# Altium PCB SD171-5.0PCB3.PcbDoc (part 4 of 5)
Units mm, origin at the board's own origin, x right, y up, seen from the top; angles counter-clockwise.
Board outline 152.27 x 99.6 mm, 6 copper layers (Top Layer, InternalPlane1, Mid-Layer 1, Mid-Layer 2, InternalPlane2, Bottom Layer); 397 components, 337 nets, 1868 pads, 651 vias.
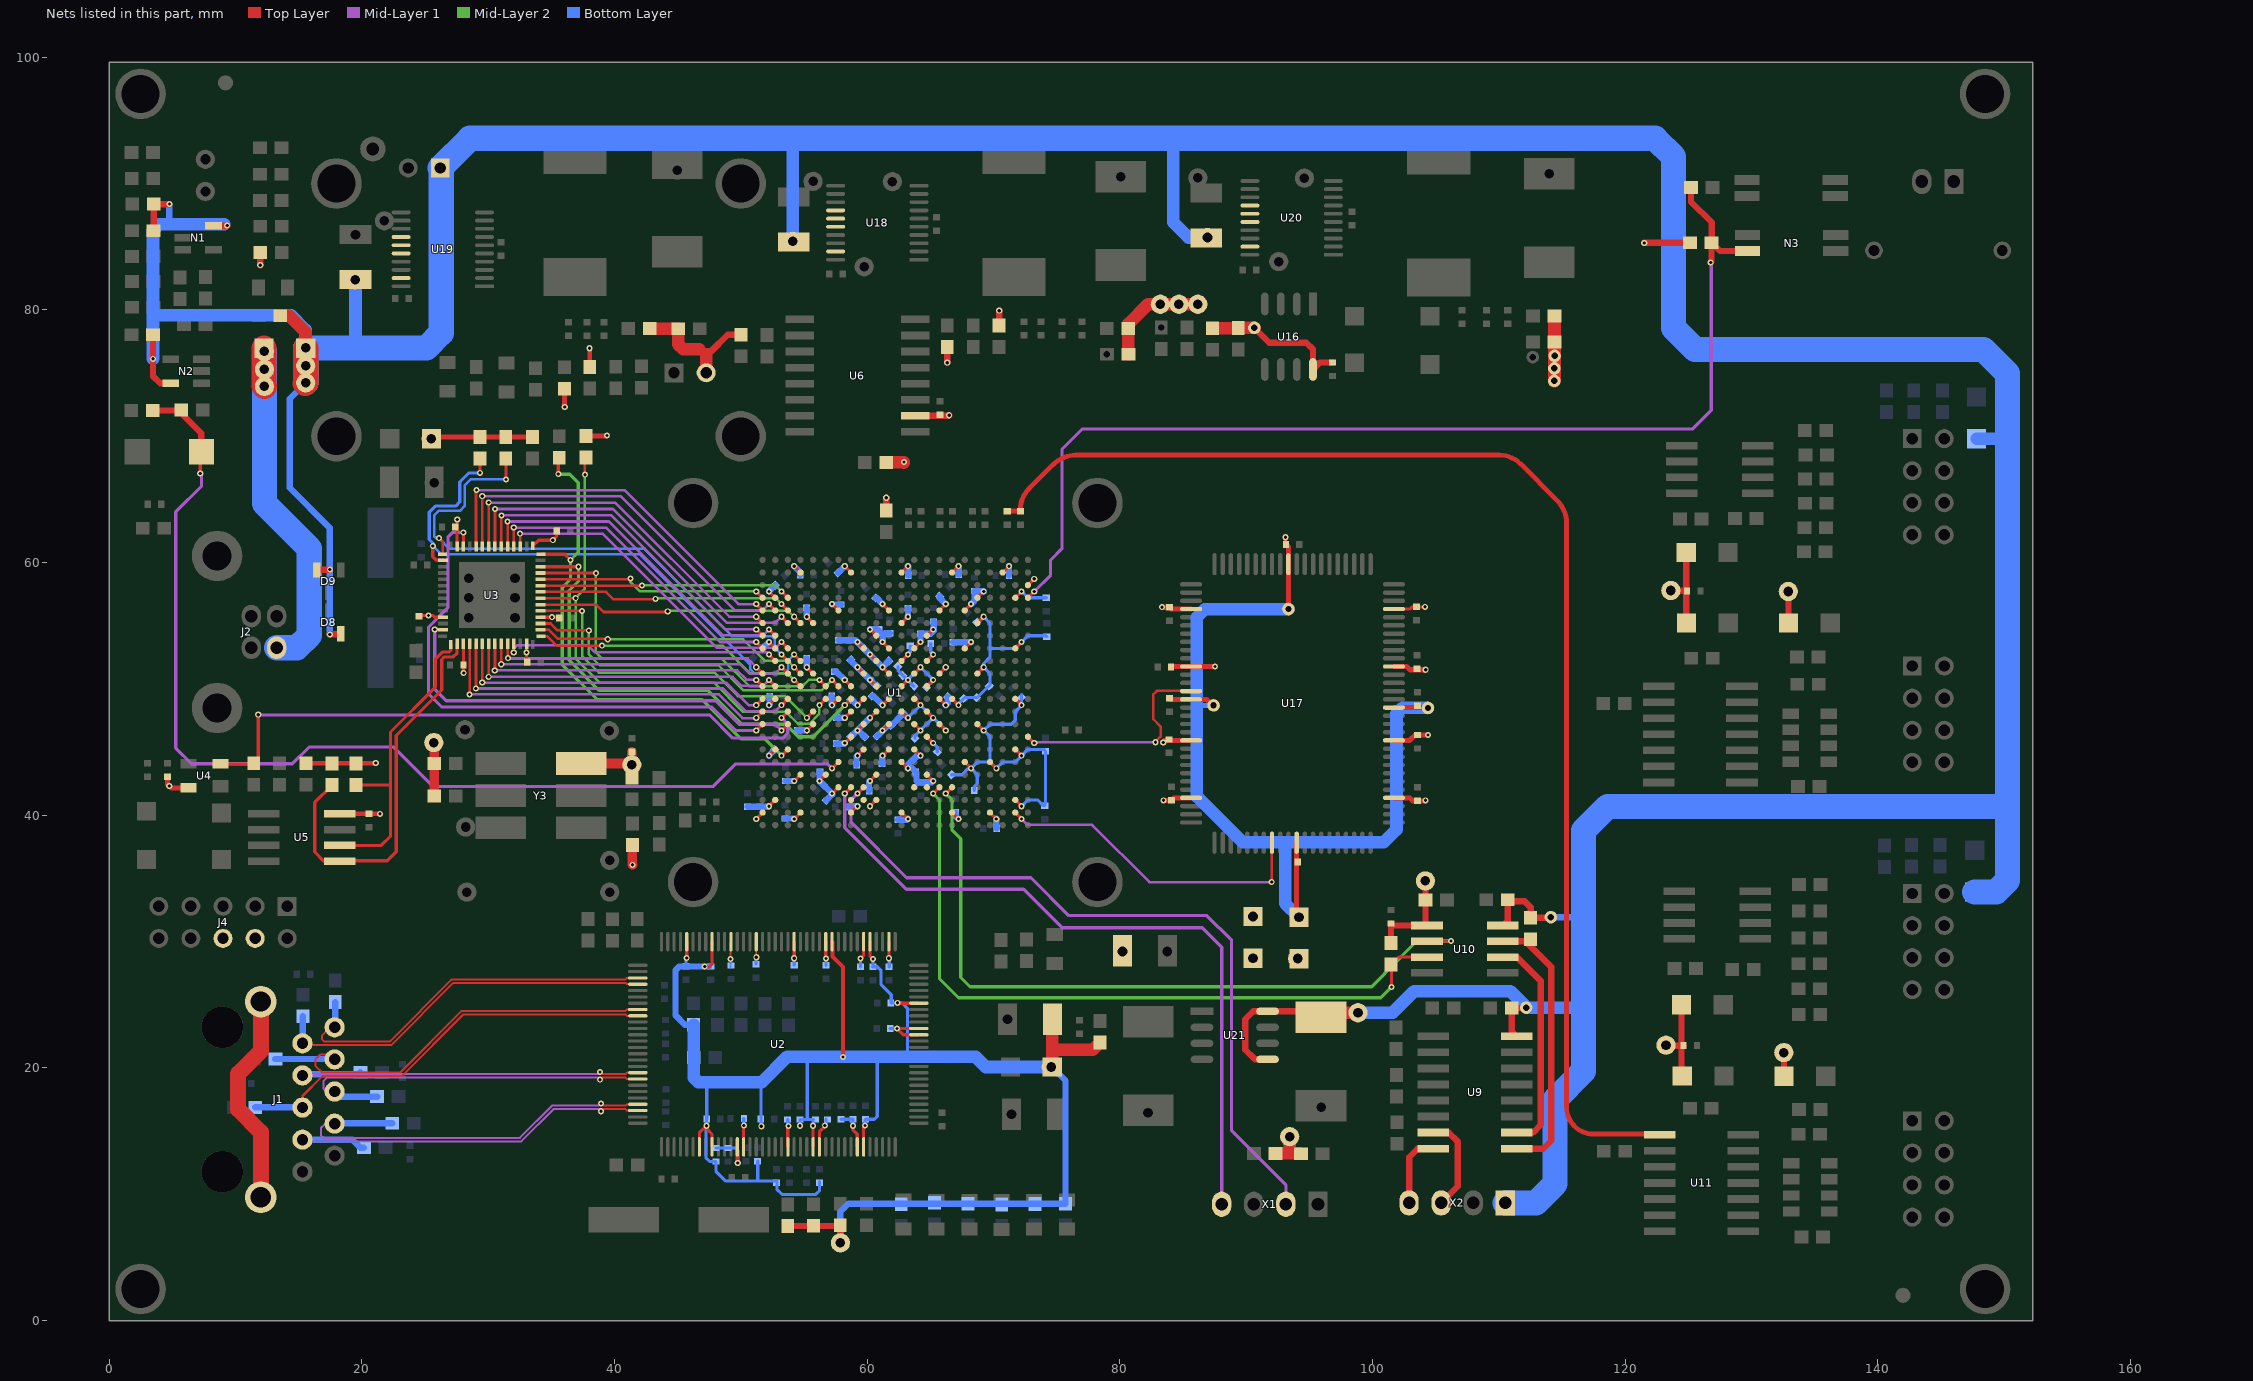
[diagram p8: the nets of this part, all layers, seen from the top]

## Via types
v1: diameter 0.483, hole 0.254, Top Layer to Bottom Layer, 651 vias

## Nets (pads, with @x,y where several pads share a name; then routed paths per layer and width w, separated by ;. In a path a pad name is that pad's centre, name@x,y a point inside that pad or via, vN(x,y) a via of type N, cw(c..) or ccw(c..) an arc to the next point about the centre after c; other vN are vias at no path point) (continued)
OPTX2: R81.1 R83.1 U11.1 | length 104.4
  Top Layer w0.203: R81.1@72.131,64.182 R81.1@72.131,64.071 ccw(c72.131,64.104) R81.1@72.164,64.104 ; 120.323,14.762 120.653,14.762 ; U11.1@122.696,14.762 cw(c122.696,14.702) U11.1@122.755,14.702
  Top Layer w0.381: R83.1@71.097,64.071 R81.1@72.131,64.071 ; R81.1@72.131,64.182 cw(c74.461,64.182) 72.814,65.83 74.748,67.764 cw(c76.544,65.968) 76.544,68.508 110.036,68.508 cw(c110.036,66.117) 111.727,67.808 114.626,64.909 cw(c112.83,63.113) 115.37,63.113 115.37,16.895 ccw(c117.503,16.895) 117.503,14.762 120.653,14.762 U11.1@122.696,14.762
R0: U9.8 X2.4 | length 5.8
  Top Layer w0.5: X2.4@102.905,9.313 102.905,12.939 103.575,13.61 U9.8@104.823,13.61
RXD: R65.1 U9.9 U10.7 | length 21.4
  Top Layer w0.508: U10.7@110.324,30.023 112.12,30.023 113.002,29.142 114.151,27.993 114.151,14.228 113.532,13.61 U9.9@111.427,13.61
RXD0: U1.D7 U10.2 | length 58.3
  Top Layer w0.254: v1(66.233,41.712) U1.D7@66.733,42.212 ; U10.2@104.324,30.023 104.353,30.053 v1(106.226,30.053)
  Mid-Layer 2 w0.254: v1(66.233,41.712) 66.729,41.216 66.729,38.816 67.415,38.13 67.415,27.157 68.151,26.42 99.952,26.42 100.968,27.436 100.968,27.487 103.533,30.053 v1(106.226,30.053)
SCL: R48.2 U3.15 U5.6 | length 24.5
  Top Layer w0.254: U5.6@18.249,37.613 21.558,37.613 22.279,38.333 22.279,42.397 ; R48.2@19.561,42.384 22.266,42.384 22.279,42.397 ; U3.15@27.049,53.525 27.049,53.06 26.902,52.913 26.388,52.913 25.835,52.359 25.835,50.144 22.279,46.588 22.279,42.397
SDA: R49.2 U3.16 U5.5 | length 31.8
  Top Layer w0.254: R49.2@17.656,42.384 16.284,41.013 16.284,37.088 17.01,36.363 U5.5@18.249,36.363 18.289,36.403 22.025,36.403 22.736,37.114 22.736,46.309 26.343,49.915 26.343,52.328 26.546,52.532 27.257,52.532 27.549,52.824 U3.16@27.549,53.575
SEL_FREQ: R111.2 R112.2 U2.77 | length 4.1
  Top Layer w0.254: U2.77@49.73,13.747 49.73,12.507 v1(49.762,12.476)
  Bottom Layer w0.254: R111.2@48.04,13.661 49.593,13.661 49.787,13.466 49.787,12.501 v1(49.762,12.476)
SHIELD: J1.M1 J1.M2 | length 17
  Top Layer w1.27: J1.M2@12.012,9.759 12.012,14.92 10.214,16.718 10.214,19.537 12.012,21.335 J1.M1@12.012,25.249
SYS_RST#: R50.2 U1.K20 U4.2 | length 51.6
  Top Layer w0.254: U4.2@8.818,44.066 11.407,44.066 R50.2@11.452,44.112 11.814,44.473 v1(11.814,47.96) ; v1(53.233,47.712) U1.K20@53.733,48.212
  Mid-Layer 1 w0.254: v1(11.814,47.96) 11.839,47.934 47.552,47.934 49.381,46.105 53.327,46.105 53.728,46.507 53.728,47.217 v1(53.233,47.712)
T0: U9.7 X2.3 | length 7.6
  Top Layer w0.5: U9.7@104.823,14.88 106.057,14.88 106.759,14.178 106.759,10.627 X2.3@105.445,9.313
TD0_N: J1.2 R6.2 U2.42 | length 30.9
  Top Layer w0.159: J1.2@15.312,21.944 15.458,21.798 22.325,21.798 27.257,26.73 40.885,26.73 40.993,26.622 U2.42@41.855,26.622
  Bottom Layer w0.508: J1.2@15.312,21.944 15.346,21.978 R6.2@15.346,24.089
TD0_P: J1.1 R5.2 U2.41 | length 30.8
  Top Layer w0.159: J1.1@17.852,23.214 17.497,23.214 16.843,22.56 16.843,22.28 17.04,22.083 22.207,22.083 27.139,27.015 40.885,27.015 40.993,27.122 U2.41@41.855,27.122
  Bottom Layer w0.508: J1.1@17.852,23.214 17.911,23.273 R5.2@17.911,25.207
TD1_N: J1.6 R8.2 U2.47 | length 33.9
  Top Layer w0.159: J1.6@15.312,16.864 15.312,17.777 16.888,19.353 23.161,19.353 28.038,24.23 40.885,24.23 40.993,24.122 U2.47@41.855,24.122
  Bottom Layer w0.508: R8.2@11.573,16.87 15.305,16.87 J1.6@15.312,16.864
TD1_P: J1.3 R7.2 U2.46 | length 34.8
  Top Layer w0.159: J1.3@17.852,20.674 17.464,21.061 16.716,21.061 16.361,20.705 16.361,20.147 16.869,19.639 23.043,19.639 27.92,24.515 40.885,24.515 40.993,24.622 U2.46@41.855,24.622
  Bottom Layer w0.508: R7.2@13.173,20.705 17.82,20.705 J1.3@17.852,20.674
TD2_N: J1.5 R10.2 U2.57 | length 30.3
  Top Layer w0.159: v1(38.865,19.068) 39.027,19.23 40.885,19.23 40.993,19.122 U2.57@41.855,19.122
  Mid-Layer 1 w0.159: J1.5@17.852,18.134 17.205,18.134 16.97,18.369 16.97,18.953 17.247,19.23 38.703,19.23 v1(38.865,19.068)
  Bottom Layer w0.508: J1.5@17.852,18.134 18.253,17.732 R10.2@21.217,17.732
TD2_P: J1.4 R9.2 U2.56 | length 31.5
  Top Layer w0.159: v1(38.865,19.677) 39.027,19.515 40.885,19.515 40.993,19.622 U2.56@41.855,19.622
  Mid-Layer 1 w0.159: J1.4@15.312,19.404 15.423,19.515 38.703,19.515 v1(38.865,19.677)
  Bottom Layer w0.508: J1.4@15.312,19.404 15.401,19.493 19.735,19.493 R9.2@19.898,19.655
TD3_N: J1.8 R12.2 U2.62 | length 33.3
  Top Layer w0.159: v1(38.941,16.568) 39.103,16.73 40.885,16.73 40.993,16.622 U2.62@41.855,16.622
  Mid-Layer 1 w0.159: J1.8@15.555,14.567 J1.8@15.312,14.324 15.458,14.178 32.63,14.178 35.182,16.73 38.779,16.73 v1(38.941,16.568)
  Bottom Layer w0.508: J1.8@15.312,14.324 19.263,14.324 19.893,13.694 R12.2@20.176,13.694
TD3_P: J1.7 R11.2 U2.61 | length 32.8
  Top Layer w0.159: v1(38.941,17.177) 39.103,17.015 40.885,17.015 40.993,17.122 U2.61@41.855,17.122
  Mid-Layer 1 w0.159: J1.7@17.852,15.594 17.116,15.594 16.767,15.244 16.767,14.686 16.989,14.463 32.512,14.463 35.064,17.015 38.779,17.015 v1(38.941,17.177)
  Bottom Layer w0.508: J1.7@17.852,15.594 17.875,15.617 R11.2@22.413,15.617
TEST1: U1.D9
TEST2: U1.D10
TEST3: U1.C13 | length 0.7
  Top Layer w0.254: v1(60.233,40.712) U1.C13@60.733,41.212
TEST4: U1.C14
TEST5: U1.D14 X1.2 | length 59.8
  Top Layer w0.254: v1(59.233,41.712) U1.D14@59.733,42.212
  Mid-Layer 1 w0.254: v1(59.233,41.712) 58.738,41.217 58.738,39.441 63.122,35.056 72.977,35.056 75.974,32.059 86.896,32.059 88.852,30.103 88.852,15.041 93.151,10.742 X1.2@93.151,9.211
TEST6: U1.C15
TEST7: U1.D15 X1.4 | length 57.5
  Top Layer w0.254: v1(58.233,41.712) U1.D15@58.733,42.212
  Mid-Layer 1 w0.254: v1(58.233,41.712) 58.233,39.654 58.233,39.026 63.117,34.142 72.393,34.142 75.441,31.094 86.541,31.094 88.071,29.564 X1.4@88.071,9.211
TONGBU_E: N3.4 R107.1 R109.2 U1.W1 | length 87
  Top Layer w0.254: U1.W1@72.733,57.212 v1(73.233,57.712)
  Top Layer w0.5: R109.2@125.214,89.684 125.214,88.56 126.851,86.923 126.851,85.327 R107.1@126.839,85.316 ; v1(126.774,83.748) 126.839,83.813 R107.1@126.839,85.316 ; N3.4@129.697,84.655 127.544,84.655 126.883,85.316 R107.1@126.839,85.316
  Mid-Layer 1 w0.254: v1(73.233,57.712) 74.527,59.006 74.527,60.202 75.441,61.117 75.441,68.991 77.016,70.566 125.327,70.566 126.825,72.064 126.825,83.697 v1(126.774,83.748)
TONGBU_L: D13.2 R103.1 R105.2 U1.F16 | length 86.5
  Top Layer w0.254: v1(7.217,67.06) 7.217,68.667 D13.2@7.311,68.761 ; v1(57.233,43.712) U1.F16@57.733,44.212
  Top Layer w0.508: R105.2@3.463,72.037 5.698,72.037 R103.1@5.723,72.063 5.723,71.83 7.311,70.243 D13.2@7.311,68.761
  Mid-Layer 1 w0.254: v1(7.217,67.06) 7.293,67.06 7.318,67.035 7.318,66.044 5.286,64.012 5.286,45.318 6.531,44.073 14.506,44.073 15.827,45.394 22.533,45.394 25.657,42.27 47.78,42.27 49.558,44.048 56.897,44.048 v1(57.233,43.712)
TXD: U9.10 U10.6 | length 17.3
  Top Layer w0.5: U10.6@110.324,28.773 111.442,28.773 113.338,26.878 113.338,15.498 112.719,14.88 U9.10@111.427,14.88
TXD0: R64.1 U1.D8 U10.3 | length 57.2
  Top Layer w0.254: v1(65.233,41.712) U1.D8@65.733,42.212 ; v1(101.501,26.395) 101.501,28.145 R64.1@101.47,28.177 102.067,28.773 U10.3@104.324,28.773
  Mid-Layer 2 w0.254: v1(65.233,41.712) 65.738,41.207 65.738,27.056 67.237,25.557 100.663,25.557 v1(101.501,26.395)
UD0: U1.K22 U3.18 | length 28.2
  Top Layer w0.203: v1(28.527,49.56) 28.549,49.582 U3.18@28.549,53.575
  Top Layer w0.254: v1(51.233,47.712) U1.K22@51.733,48.212
  Mid-Layer 1 w0.203: v1(28.527,49.56) 48.263,49.56 50.143,47.68 51.201,47.68 v1(51.233,47.712)
UD1: U1.L20 U3.19 | length 29.4
  Top Layer w0.203: v1(29.035,50.042) 29.049,50.056 U3.19@29.049,53.575
  Top Layer w0.254: v1(53.233,48.712) U1.L20@53.733,49.212
  Mid-Layer 1 w0.203: v1(29.035,50.042) 29.048,50.03 48.584,50.03 50.371,48.242 52.763,48.242 v1(53.233,48.712)
UD2: U1.L22 U3.20 | length 26.2
  Top Layer w0.203: v1(29.543,50.5) 29.549,50.506 U3.20@29.549,53.575
  Top Layer w0.254: v1(51.233,48.712) U1.L22@51.733,49.212
  Mid-Layer 1 w0.203: v1(29.543,50.5) 29.569,50.474 48.863,50.474 50.625,48.712 v1(51.233,48.712)
UD3: U1.M21 U3.21 | length 26
  Top Layer w0.203: U3.21@30.049,53.575 30.049,50.959 v1(30.051,50.957)
  Top Layer w0.254: v1(52.233,50.712) U1.M21@52.733,50.212
  Mid-Layer 1 w0.203: v1(30.051,50.957) 42.853,50.957 49.355,50.957 50.07,50.242 51.763,50.242 v1(52.233,50.712)
UD4: U1.M22 U3.22 | length 23.8
  Top Layer w0.203: v1(30.534,51.465) 30.549,51.48 U3.22@30.549,53.575
  Top Layer w0.254: v1(51.233,50.712) U1.M22@51.733,50.212
  Mid-Layer 1 w0.203: v1(30.534,51.465) 49.711,51.465 50.447,50.728 51.217,50.728 v1(51.233,50.712)
UD5: U1.N20 U3.23 | length 25.1
  Top Layer w0.203: v1(31.042,51.947) 31.049,51.955 U3.23@31.049,53.575
  Top Layer w0.254: v1(53.233,51.712) U1.N20@53.733,51.212
  Mid-Layer 1 w0.203: v1(31.042,51.947) 49.99,51.947 50.752,51.185 52.706,51.185 v1(53.233,51.712)
UD6: U1.N22 U3.24 | length 21.9
  Top Layer w0.203: v1@31.549,52.405 U3.24@31.549,53.575 ; v1@31.55,52.405 v1(31.575,52.43)
  Top Layer w0.254: v1(51.233,51.712) U1.N22@51.733,51.212
  Mid-Layer 1 w0.203: v1(31.575,52.43) 31.601,52.405 50.541,52.405 v1(51.233,51.712) v1@51.214,51.693
UD7: U1.P21 U3.25 | length 22.3
  Top Layer w0.203: v1@32.049,52.887 U3.25@32.049,53.575
  Top Layer w0.254: v1(52.233,52.712) U1.P21@52.733,52.212
  Mid-Layer 1 w0.203: v1(32.032,52.887) 32.032,53.167 32.312,53.446 37.925,53.446 38.484,52.887 52.058,52.887 v1(52.233,52.712)
UD8: U1.R20 U3.45 | length 26.4
  Top Layer w0.203: v1(32.54,62.285) 32.549,62.276 U3.45@32.549,61.275
  Top Layer w0.254: v1(53.233,53.712) U1.R20@53.733,53.212
  Mid-Layer 1 w0.203: v1(32.54,62.285) 39.068,62.285 48.111,53.242 52.763,53.242 v1(53.233,53.712)
UD9: U1.R22 U3.46 | length 25.2
  Top Layer w0.203: v1(32.032,62.768) 32.049,62.751 32.049,62.2 U3.46@32.049,61.275
  Top Layer w0.254: v1(51.233,53.712) U1.R22@51.733,53.212
  Mid-Layer 1 w0.203: v1(32.032,62.768) 36.503,62.768 39.322,62.768 48.378,53.712 v1(51.233,53.712)
UD10: U1.T21 U3.47 | length 27.3
  Top Layer w0.203: U3.47@31.549,61.275 31.549,61.955 v1(31.55,63.25)
  Top Layer w0.254: v1(52.233,54.712) U1.T21@52.733,54.212
  Mid-Layer 1 w0.203: v1(31.55,63.25) 39.576,63.25 48.584,54.242 51.763,54.242 v1(52.233,54.712)
UD11: U1.T22 U3.48 | length 27.2
  Top Layer w0.203: U3.48@31.049,61.275 31.049,63.123 31.049,63.766 31.067,63.784 v1(31.067,63.733)
  Top Layer w0.254: v1(51.233,54.712) U1.T22@51.733,54.212
  Mid-Layer 1 w0.203: v1(31.067,63.733) 39.754,63.733 48.775,54.712 v1(51.233,54.712)
UD12: U1.U20 U3.49 | length 30.3
  Top Layer w0.203: U3.49@30.549,61.275 30.549,63.073 30.549,64.231 v1(30.559,64.241)
  Top Layer w0.254: v1(53.233,55.712) U1.U20@53.733,55.212
  Mid-Layer 1 w0.203: v1(30.559,64.241) 39.881,64.241 48.88,55.242 52.763,55.242 v1(53.233,55.712)
UD13: U1.U22 U3.50 | length 29.1
  Top Layer w0.203: U3.50@30.049,61.275 30.049,63.174 30.049,64.696 30.051,64.698 v1(30.051,64.749)
  Top Layer w0.254: v1(51.233,55.712) U1.U22@51.733,55.212
  Mid-Layer 1 w0.203: v1(30.051,64.749) 40.059,64.749 49.096,55.712 v1(51.233,55.712)
UD14: U1.V21 U3.51 | length 31.3
  Top Layer w0.203: v1(29.543,65.257) 29.549,65.251 29.549,63.936 U3.51@29.549,61.275
  Top Layer w0.254: v1(52.233,56.712) U1.V21@52.733,56.212
  Mid-Layer 1 w0.203: v1(29.543,65.257) 40.491,65.257 49.505,56.242 51.763,56.242 v1(52.233,56.712)
UD15: U1.V22 U3.52 | length 31.1
  Top Layer w0.203: U3.52@29.049,61.275 29.049,64.47 29.049,65.703 v1(29.086,65.74)
  Top Layer w0.254: v1(51.233,56.712) U1.V22@51.733,56.212
  Mid-Layer 1 w0.203: v1(29.086,65.74) 40.785,65.74 49.812,56.712 v1(51.233,56.712)
URXD: U1.Y1 | length 0.7
  Top Layer w0.254: U1.Y1@72.733,58.212 v1(73.233,58.712)
USB5V: J2.1 L3.1 pad.11@12.297,76.712 pad.12@12.297,75.29 pad.13@12.297,73.944 | length 30
  Top Layer w2: L3.1@12.264,76.965 12.264,73.977 pad.13@12.297,73.944
  Bottom Layer w2: pad.11@12.297,76.712 12.297,64.673 15.853,61.117 15.853,54.233 14.88,53.261 J2.1@13.265,53.261
USB_CLKOUT: U1.J22 U3.54 | length 43.4
  Top Layer w0.254: v1(28.045,62.387) 28.049,62.382 U3.54@28.049,61.275 ; v1(51.233,46.712) U1.J22@51.733,47.212
  Mid-Layer 1 w0.254: v1(28.045,62.387) 27.206,62.387 26.825,62.006 26.825,56.432 25.289,54.896 25.289,49.623 26.343,48.569 47.701,48.569 49.558,46.712 v1(51.233,46.712)
USB_EN: U1.B22 | length 0.7
  Top Layer w0.254: v1(51.233,39.712) U1.B22@51.733,40.212
USB_FADDR0: U1.W20 U3.37 | length 20.2
  Top Layer w0.203: U3.37@34.149,58.175 39.83,58.175 42.273,58.175 42.294,58.196 v1(42.192,58.196)
  Top Layer w0.254: v1(53.233,57.712) U1.W20@53.733,57.212
  Mid-Layer 2 w0.203: v1(42.192,58.196) 52.749,58.196 v1(53.233,57.712)
USB_FADDR1: U1.W22 U3.38 | length 18.4
  Top Layer w0.203: U3.38@34.149,58.675 41.224,58.675 v1(41.278,58.729)
  Top Layer w0.254: v1(51.233,57.712) U1.W22@51.733,57.212
  Mid-Layer 2 w0.203: v1(41.278,58.729) 41.278,58.446 42.011,57.712 v1(51.233,57.712)
USB_FLAGA#: U1.M19 U3.29 | length 22.2
  Top Layer w0.203: U3.29@34.199,54.175 34.674,54.175 35.428,53.421 v1(39.017,53.421) v1@39.068,53.421
  Top Layer w0.254: v1(54.233,50.712) U1.M19@54.733,50.212
  Mid-Layer 2 w0.203: v1(39.017,53.421) 48.568,53.421 50.752,51.236 53.709,51.236 v1(54.233,50.712)
USB_FLAGB#: U1.N19 U3.30 | length 22.2
  Top Layer w0.203: U3.30@34.149,54.675 34.817,54.675 35.538,53.954 39.525,53.954 39.551,53.929 v1(39.475,53.929)
  Top Layer w0.254: v1(54.233,51.712) U1.N19@54.733,51.212
  Mid-Layer 2 w0.203: v1(39.475,53.929) 50.193,53.929 51.88,52.242 53.703,52.242 v1(54.233,51.712) v1@54.173,51.712
USB_FLAGC#: U1.M16 U3.31 | length 27.5
  Top Layer w0.203: U3.31@34.158,55.166 U3.31@34.149,55.175 34.952,55.175 35.499,54.627 v1(37.976,54.627)
  Top Layer w0.254: v1(57.233,50.712) U1.M16@57.733,50.212
  Mid-Layer 2 w0.203: v1(37.976,54.627) 37.976,52.735 38.84,51.871 48.238,51.871 50.219,49.89 56.411,49.89 v1(57.233,50.712) v1@57.233,50.681
USB_FLAGD: U1.L15 U3.40 | length 36.8
  Top Layer w0.254: U3.40@34.149,59.675 34.155,59.669 v1(37.163,59.669) ; v1(58.233,48.712) U1.L15@58.733,49.212
  Mid-Layer 2 w0.254: v1(37.163,59.669) 37.163,58.526 36.427,57.789 36.427,52.252 38.814,49.865 47.425,49.865 50.082,47.207 53.572,47.207 54.562,46.217 55.738,46.217 v1(58.233,48.712)
USB_IFCLK: U1.J20 U3.13 | length 34.9
  Top Layer w0.254: v1(25.784,54.691) 26.434,54.691 U3.13@26.449,54.675 ; v1(53.233,46.712) U1.J20@53.733,47.212
  Mid-Layer 1 w0.254: v1(25.784,54.691) 25.784,49.966 26.686,49.064 48.022,49.064 49.889,47.198 50.6,47.198 50.619,47.217 52.728,47.217 v1(53.233,46.712)
USB_INT0: U1.K18 U3.33 | length 27.4
  Top Layer w0.203: U3.33@34.149,56.175 v1(37.443,56.175)
  Top Layer w0.254: v1(55.233,47.712) U1.K18@55.733,48.212
  Mid-Layer 2 w0.203: v1(37.443,56.175) 37.443,52.608 38.763,51.287 47.933,51.287 49.787,49.433 53.512,49.433 v1(55.233,47.712)
USB_INT1: U1.U19 U3.34 | length 21.4
  Top Layer w0.152: U3.34@34.149,56.675 U3.34@34.184,56.71
  Top Layer w0.203: U3.34@34.149,56.675 38.557,56.675 39.144,56.088 44.174,56.088 v1(44.224,56.138) v1@44.224,56.189
  Top Layer w0.254: v1(54.233,55.712) U1.U19@54.733,55.212
  Mid-Layer 2 w0.203: v1(44.224,56.138) 44.268,56.182 53.763,56.182 v1(54.233,55.712)
USB_PKEND: U1.M17 U3.39 | length 30.4
  Top Layer w0.203: U3.39@34.149,59.175 38.521,59.175 v1(38.535,59.161)
  Top Layer w0.254: v1(56.233,50.712) U1.M17@56.733,50.212
  Mid-Layer 2 w0.203: v1(38.535,59.161) 38.535,52.887 39.005,52.417 48.479,52.417 50.676,50.22 54.892,50.22 55.384,50.712 v1(56.233,50.712)
USB_RST#: R34.2 U1.G20 U3.42 | length 41.7
  Top Layer w0.254: U3.42@34.199,60.675 34.215,60.66 35.233,60.66 36.071,60.66 v1(36.528,60.202) ; v1(35.563,67.01) 35.563,68.216 R34.2@35.639,68.292 ; v1(53.233,44.712) U1.G20@53.733,45.212
  Mid-Layer 2 w0.254: v1(35.563,67.01) 35.588,66.984 36.477,66.984 37.138,66.324 37.138,60.812 v1(36.528,60.202) 36.528,58.678 35.868,58.018 35.868,51.922 38.624,49.166 46.904,49.166 50.016,46.055 51.891,46.055 v1(53.233,44.712)
USB_SLOE: R33.2 U1.L17 U3.35 | length 42.3
  Top Layer w0.203: U3.35@34.149,57.175 v1@36.939,57.175 ; v1(36.935,57.18) v1@36.939,57.175 ; v1@37.011,57.175 v1@36.939,57.175 ; v1(37.671,66.959) 37.671,68.242 R33.2@37.747,68.318
  Top Layer w0.254: v1(56.233,48.712) U1.L17@56.733,49.212
  Mid-Layer 2 w0.203: v1(37.671,66.959) 37.646,66.984 37.646,57.891 v1(36.935,57.18) 36.935,52.405 38.84,50.5 47.882,50.5 50.193,48.188 53.572,48.188 54.518,47.242 55.428,47.242 56.233,48.048 v1(56.233,48.712)
USB_SLRD#: R32.2 U1.P20 U3.1 | length 45
  Top Layer w0.203: v1(26.114,61.93) 26.399,61.645 U3.1@26.399,60.675 ; R32.2@31.397,68.242 31.423,68.216 v1(31.423,66.578)
  Top Layer w0.254: v1(53.233,52.712) U1.P20@53.733,52.212
  Bottom Layer w0.203: v1(31.423,66.578) 28.629,66.578 28.146,66.095 28.146,64.47 27.765,64.089 26.089,64.089 25.759,63.758 25.759,62.057 25.886,61.93 v1(26.114,61.93) 26.952,61.091 42.396,61.091 49.305,54.182 52.428,54.182 52.703,53.907 52.703,53.242 v1(53.233,52.712)
USB_SLWR#: R31.2 U1.P19 U3.2 | length 46.7
  Top Layer w0.254: v1(25.632,61.32) 25.632,60.456 25.913,60.175 U3.2@26.449,60.175 ; v1@29.34,67.086 v1(29.358,67.104) R31.2@29.358,68.24 ; v1(54.233,52.712) U1.P19@54.733,52.212
  Bottom Layer w0.203: v1(25.632,61.32) 26.279,60.672 41.976,60.672 50.763,51.886 50.763,51.518 51.038,51.242 53.428,51.242 53.763,51.578 53.763,52.242 v1(54.233,52.712)
  Bottom Layer w0.254: v1(25.632,61.32) 25.632,61.549 25.352,61.828 25.352,63.987 25.835,64.47 27.435,64.47 27.765,64.8 27.765,66.375 28.476,67.086 29.365,67.086 29.365,67.096 v1(29.358,67.104)
USB_WU2: U1.V20 U3.36 | length 20.3
  Top Layer w0.203: U3.36@34.149,57.675 39.335,57.675 39.906,57.104 43.234,57.104 v1(43.259,57.129)
  Top Layer w0.254: v1(53.233,56.712) U1.V20@53.733,56.212
  Mid-Layer 2 w0.203: v1(43.259,57.129) 43.312,57.182 52.763,57.182 v1(53.233,56.712)
VCC1V2: C24.2 C25.2 C26.2 C27.2 C28.2 C29.2 C30.1 C31.2 C32.2 C33.2 C34.2 C35.2 C36.2 C162.2 C163.2 C164.2 C165.2 C166.2 C167.2 C168.2 C169.2 C170.2 C171.2 C172.2 C173.2 C174.2 C175.2 C176.2 C177.2 C178.2 C179.2 C180.2 C181.2 C182.2 pad.10@80.216,29.214 pad.14@114.397,74.383 pad.14@114.402,75.374 pad.14@114.423,76.364 R95.2 U1.J8 U1.J10 U1.J12 U1.J14 U1.K9 U1.K11 U1.K13 U1.L10 U1.L12 U1.L14 U1.M9 U1.M11 U1.M13 U1.N10 U1.N12 U1.N14 U1.P9 U1.P11 U1.P13 U1.R14 U2.2 U2.6 U2.12 U2.17 U2.23 U2.27 U2.78 U2.85 U2.90 U2.96 U2.117 U2.118 | length 76
  Top Layer w0.152: v1@49.203,28.579 49.203,29.97 U2.27@49.23,29.997 ; U2.23@51.23,29.997 51.23,28.66 51.235,28.656 v1@51.235,28.63
  Top Layer w0.254: U2.78@50.23,13.747 50.23,15.433 v1(50.244,15.448) ; U2.85@53.73,13.747 53.73,15.352 v1(53.775,15.397) ; U2.17@54.23,29.997 v1(54.232,28.681) v1(54.232,28.681) ; U2.90@56.23,13.747 56.23,14.931 56.721,15.422 v1@56.721,15.371 ; U2.12@56.73,29.997 56.73,28.647 56.747,28.63 v1(56.747,28.656) ; v1(58.88,15.422) 58.88,15.092 59.23,14.742 U2.96@59.23,13.747 ; v1(59.233,46.712) U1.J14@59.733,47.212 ; v1(59.233,48.712) U1.L14@59.733,49.212 ; v1(59.233,51.712) U1.N14@59.733,51.212 ; v1(59.233,53.712) U1.R14@59.733,53.212 ; v1(59.49,28.656) 59.73,28.896 U2.6@59.73,29.997 ; v1(60.233,47.712) U1.K13@60.733,48.212 ; v1(60.233,50.712) U1.M13@60.733,50.212 ; v1(60.233,52.712) U1.P13@60.733,52.212 ; v1(61.233,46.712) U1.J12@61.733,47.212 ; v1(61.233,48.712) U1.L12@61.733,49.212 ; v1(61.233,51.712) U1.N12@61.733,51.212 ; v1(61.725,28.681) 61.73,28.686 U2.2@61.73,29.997 ; v1(62.36,23.118) 62.856,22.622 U2.117@64.105,22.622 ; v1@62.36,23.122 U2.118@64.105,23.122 ; U1.K11@62.733,48.212 v1(63.233,47.712) ; U1.M11@62.733,50.212 v1(63.233,50.712) ; U1.P11@62.733,52.212 v1(63.233,52.712) ; U1.J10@63.733,47.212 v1(64.233,46.712) ; U1.L10@63.733,49.212 v1(64.233,48.712) ; U1.N10@63.733,51.212 v1(64.233,51.712) ; U1.K9@64.733,48.212 v1(65.233,47.712) ; U1.M9@64.733,50.212 v1(65.233,50.712) ; U1.P9@64.733,52.212 v1(65.233,52.712) ; U1.J8@65.733,47.212 v1(66.233,46.712)
  Top Layer w1: pad.14@114.405,74.376 114.41,74.381 R95.2@114.41,79.505
  Bottom Layer w0.152: C31.2@49.202,27.977 v1@49.202,28.579
  Bottom Layer w0.254: v1(50.244,15.448) 50.244,15.984 C26.2@50.261,16.001 ; C32.2@51.215,28.215 51.215,28.737 v1(51.235,28.757) ; C25.2@53.718,15.914 53.718,15.428 53.749,15.397 v1(53.775,15.397) ; v1(54.232,28.681) 54.232,28.144 C33.2@54.238,28.139 ; v1@56.741,15.352 C27.2@56.741,15.939 ; C34.2@56.747,28.13 v1(56.747,28.656) ; C29.2@57.935,15.939 C24.2@58.875,15.939 58.875,15.428 v1(58.88,15.422) ; C35.2@59.489,28.003 v1(59.49,28.656) ; v1(61.725,28.681) 61.75,28.656 C28.2@61.75,28.003 ; C36.2@61.836,23.111 62.353,23.111 v1(62.36,23.118) ; C180.2@62.439,51.781 62.439,51.486 C171.2@63.711,50.214 ; v1(63.233,47.712) v1(64.233,48.712) v1(65.233,47.712) ; v1(63.233,50.712) v1(64.233,51.712) v1(65.233,50.712) 65.233,50.65 C172.2@64.704,50.121 ; v1(63.233,52.712) 63.421,52.9 C168.2@63.421,53.404 ; C179.2@63.798,46.086 63.798,46.277 v1(64.233,46.712) v1(65.233,47.712) ; C169.2@65.037,53.597 65.037,52.908 v1(65.233,52.712) ; v1(66.233,46.712) v1(65.233,47.712)
  Bottom Layer w0.5: C182.2@57.757,53.861 C163.2@58.57,53.861 59.084,53.861 v1(59.233,53.712) v1(60.233,52.712) v1(61.233,51.712) ; C175.2@58.693,46.213 58.734,46.213 v1(59.233,46.712) ; C173.2@58.706,49.164 58.781,49.164 v1(59.233,48.712) ; C165.2@58.717,52.296 58.717,52.229 v1(59.233,51.712) v1(60.233,50.712) ; C176.2@59.836,46.188 59.311,46.712 v1(59.233,46.712) ; v1(60.233,47.712) v1(59.233,46.712) ; v1@60.359,50.712 v1(60.233,50.712) ; C166.2@60.408,49.443 60.502,49.443 v1(61.233,48.712) ; C174.2@60.776,50.226 60.719,50.226 v1(60.233,50.712) ; C177.2@60.801,46.265 61.633,47.097 C181.2@61.907,47.097 62.77,47.96 C178.2@62.77,48.097 62.848,48.097 v1(63.233,47.712) ; v1(61.233,51.712) C167.2@61.737,52.216
  other v1: 56.659,15.433 49.203,28.63
VCC1V8: C142.2 C143.2 C144.2 C145.2 C146.2 C147.2 C148.2 C149.2 C150.2 C151.2 C152.2 C153.2 pad.1@86.185,80.446 pad.2@84.687,80.446 pad.3@83.213,80.446 R93.2 U1.C2 U1.F4 U1.F6 U1.G2 U1.J5 U1.L2 U1.L7 U1.N5 U1.R2 U1.U5 U1.W2 | length 58.6
  Top Layer w0.254: U1.L7@66.733,49.212 v1(67.233,48.712) ; U1.F6@67.733,44.212 v1(68.233,43.712) ; U1.J5@68.733,47.212 v1(69.233,46.712) ; U1.N5@68.733,51.212 v1(69.233,51.712) ; U1.U5@68.733,55.212 v1(69.233,55.712) ; U1.F4@69.733,44.212 v1(70.233,43.712) ; U1.C2@71.733,41.212 v1(72.233,40.712) ; U1.G2@71.733,45.212 v1(72.233,44.712) ; U1.L2@71.733,49.212 v1(72.233,48.712) ; U1.R2@71.733,53.212 v1(72.233,53.712) ; U1.W2@71.733,57.212 v1(72.233,57.712)
  Top Layer w1: C142.2@80.685,76.491 80.685,78.883 82.248,80.446 pad.1@86.185,80.446
  Bottom Layer w0.25: C150.2@66.699,43.203 66.702,43.205 67.512,43.205 68.019,43.712 v1(68.233,43.712) 68.726,43.219 68.726,42.508 68.49,42.272 C152.2@68.49,41.958
  Bottom Layer w0.254: v1(67.233,48.712) 67.233,48.826 C148.2@67.647,49.24 67.723,49.316 68.739,49.316 69.649,50.226 C143.2@69.665,50.226 69.728,50.289 69.728,51.217 v1(69.233,51.712) 69.233,52.012 69.728,52.507 69.728,53.217 ; v1(68.233,43.712) 68.728,44.207 69.738,44.207 ; C145.2@68.686,55.279 68.8,55.279 v1(69.233,55.712) 69.728,55.217 69.728,53.217 ; C153.2@72.226,49.533 72.233,49.525 v1(72.233,48.712) 71.728,48.207 71.728,47.507 71.429,47.207 69.738,47.207 69.242,46.712 v1(69.233,46.712) 69.738,46.207 69.738,44.207 ; v1(72.233,40.712) 72.728,41.207 73.506,41.207 C151.2@73.953,40.761 ; v1(72.233,57.712) 72.242,57.712 72.738,57.217 74.17,57.217 C144.2@74.182,57.205 ; C151.2@74.068,40.761 C151.2@73.953,40.761 ; C146.2@74.224,54.142 74.158,54.208 72.728,54.208 v1(72.233,53.712) 71.728,53.208 69.738,53.208 69.728,53.217 ; 69.738,44.207 v1(70.233,43.712) 70.242,43.712 70.738,44.207 71.728,44.207 v1(72.233,44.712) 72.728,45.207 73.989,45.207 C149.2@74.122,45.074 74.122,40.93 C151.2@73.953,40.761
VCC2V5: C14.2 C15.2 C16.2 C17.2 C18.2 C19.2 C20.1 C21.2 C22.2 C23.2 L1.1 pad.3@57.89,6.151 pad.4@74.577,20.07 R2.1 R4.1 R15.1 R16.1 R17.1 R22.1 R23.1 R24.2 R25.2 R27.1 R28.1 R96.1 R111.1 R113.1 R115.1 R117.1 U2.5 U2.11 U2.30 U2.34 U2.71 U2.73 U2.89 U2.97 U2.122 | length 157.1
  Top Layer w0.254: v1(45.723,28.706) 45.73,28.713 U2.34@45.73,29.997 ; U2.71@46.73,13.747 46.73,14.854 v1(47.298,15.422) 47.298,15.168 47.73,14.736 U2.73@47.73,13.747 ; v1(47.145,28.021) 47.171,27.995 47.526,27.995 47.73,28.198 47.73,28.757 U2.30@47.73,29.997 ; v1@54.638,15.448 54.664,15.422 v1(54.689,15.422) ; U2.89@55.73,13.747 v1@55.73,15.396 ; v1@55.731,15.397 v1(55.731,15.422) ; U2.97@59.73,13.747 59.73,15.307 59.871,15.448 v1(59.845,15.448) ; U2.5@60.23,29.997 60.23,28.855 60.455,28.63 v1(60.48,28.63) ; v1@62.411,25.122 U2.122@64.105,25.122
  Top Layer w0.3: U2.11@57.23,29.997 57.265,29.963 57.265,28.823 58.093,27.995 v1(58.093,20.858)
  Top Layer w0.5: R25.2@53.724,7.485 R23.1@57.674,7.485 ; R23.1@57.884,7.552 57.884,6.157 pad.3@57.89,6.151 ; C20.1@74.655,23.84 C20.1@74.678,23.862 ; R96.1@78.251,21.823 R96.1@78.432,22.005
  Top Layer w1: L1.1@74.655,20.063 C20.1@74.655,23.84 ; 74.704,21.442 77.87,21.442 R96.1@78.432,22.005
  Bottom Layer w0.254: C21.2@45.672,28.054 45.672,28.655 v1(45.723,28.706) ; 47.247,18.851 47.307,18.791 C16.2@47.307,15.961 47.298,15.952 v1(47.298,15.422) 47.247,15.371 47.247,12.882 47.535,12.594 R111.1@48.04,12.594 48.04,11.835 48.831,11.044 51.336,11.044 ; R117.1@51.342,12.619 51.342,11.05 51.336,11.044 ; v1@51.616,15.473 51.599,15.489 C15.2@51.599,15.961 51.599,18.809 51.641,18.851 ; v1(54.689,15.422) 54.689,15.894 C17.2@54.709,15.914 55.273,15.914 ; 55.324,20.883 55.273,20.832 55.273,15.914 ; v1(55.731,15.422) C14.2@55.731,15.894 ; C14.2@55.75,15.914 C14.2@55.731,15.894 ; R113.1@56.244,11.019 56.244,10.297 55.934,9.987 53.267,9.987 52.866,10.387 52.866,11.044 51.336,11.044 ; v1(59.845,15.448) 59.845,15.894 C19.2@59.891,15.939 60.591,15.939 60.811,16.159 60.811,20.858 60.836,20.883 ; v1(60.48,28.63) 60.48,28.029 C22.2@60.455,28.003 60.803,28.003 61.115,27.69 61.115,26.598 61.912,25.802 61.912,25.143 62.773,25.143 63.198,24.719 63.198,20.934 63.249,20.883 63.198,20.883 ; 55.273,15.914 55.711,15.914 C14.2@55.731,15.894
  Bottom Layer w0.5: R2.1@46.274,23.409 45.585,23.409 44.834,24.16 44.834,27.741 45.113,28.021 C18.2@47.493,28.021 ; pad.3@57.89,6.151 57.89,8.615 58.525,9.25 75.711,9.25 R16.1@75.714,9.254 75.714,18.984 pad.4@74.755,19.943
  Bottom Layer w1: R2.1@46.274,23.409 46.282,23.402 46.282,19.232 46.663,18.851 47.247,18.851 51.641,18.851 53.673,20.883 55.324,20.883 60.836,20.883 63.198,20.883 ; 63.249,20.883 68.583,20.883 69.396,20.07 pad.4@74.577,20.07
  other v1: 51.632,15.38 62.411,25.15
VCC3V3: C41.2 C42.2 C43.2 C44.2 C45.2 C46.2 C48.1 C52.1 C53.2 C54.2 C62.1 C80.1 C94.2 C95.2 C96.2 C97.2 C98.2 C99.2 C100.2 C101.2 C102.2 C103.2 C104.2 C105.2 C106.2 C107.2 C108.2 C109.2 C110.2 C111.2 C112.2 C113.2 C114.2 C115.2 C116.2 C117.2 C118.2 C119.2 C120.2 C121.2 C122.2 C123.2 C124.2 C125.2 C126.2 C127.2 C128.2 C129.2 C130.2 C131.2 C132.2 C133.2 C134.2 C135.2 C136.2 C137.2 C138.2 C139.2 C140.2 C141.2 J3.2 J4.4 J4.6 L2.2 L4.1 L5.1 L6.1 L7.2 L9.1 L11.2 L12.2 L13.2 pad.0@25.708,45.75 pad.0@104.194,34.802 pad.0@123.625,57.789 pad.1@41.379,43.997 pad.1@90.554,28.681 pad.1@132.921,57.713 pad.2@123.244,21.798 pad.3@132.566,21.213 pad.5@93.45,14.559 pad.6@25.505,69.804 pad.11@94.085,28.656 pad.14@90.653,78.579 R29.1 R30.1 R31.1 R32.1 R33.1 R38.1 R39.1 R40.2 R43.1 R45.1 R46.2 R48.1 R49.1 R52.2 R53.2 R54.2 R57.2 R58.2 R60.2 R62.2 R64.2 R88.2 R91.2 R94.2 R107.2 U1.AA3 U1.AA7 U1.AA11 U1.AA15 U1.AA19 U1.B4 U1.B7 U1.B11 U1.B15 U1.B19 U1.C21 U1.D16 U1.E9 U1.E13 U1.E17 U1.E19 U1.F11 U1.G10 U1.G12 U1.G14 U1.G21 U1.H9 U1.H15 U1.J18 U1.K15 U1.L8 U1.L16 U1.L21 U1.M15 U1.N8 U1.N18 U1.R6 U1.R10 U1.R12 U1.R21 U1.T9 U1.T13 U1.U11 U1.U18 U1.V6 U1.V8 U1.V12 U1.V16 U1.W5 U1.W21 U3.11 U3.17 U3.27 U3.32 U3.43 U3.55 U4.4 U5.8 U6.2 U10.1 U16.8 Y3.6 | length 183.2
  Top Layer w0.254: C41.2@24.534,55.766 24.576,55.808 24.997,55.808 v1(25.276,55.808) 25.651,55.808 25.784,55.675 U3.11@26.449,55.675 ; U3.55@27.549,61.275 27.549,63.339 27.537,63.352 27.537,63.377 v1(27.562,63.403) ; v1@28.045,51.439 28.049,51.444 U3.17@28.049,53.575 ; U3.27@33.049,53.575 v1(33.049,52.887) 33.049,52.203 C43.2@33.108,52.144 ; U3.43@33.549,61.325 33.998,61.774 v1(35.128,61.774) 35.411,62.057 35.411,62.489 C48.1@35.431,62.51 ; U3.32@34.149,55.675 v1(35.055,55.675) 35.546,55.675 C44.2@35.623,55.598 ; v1(52.233,40.712) U1.C21@52.733,41.212 ; v1(52.233,44.712) U1.G21@52.733,45.212 ; v1(52.233,48.712) U1.L21@52.733,49.212 ; v1(52.233,53.712) U1.R21@52.733,53.212 ; v1(52.233,57.712) U1.W21@52.733,57.212 ; v1(54.233,39.712) U1.B19@54.733,40.212 ; v1(54.233,42.712) U1.E19@54.733,43.212 ; v1(54.233,59.712) U1.AA19@54.733,59.212 ; v1(55.233,46.712) U1.J18@55.733,47.212 ; v1(55.233,51.712) U1.N18@55.733,51.212 ; v1(55.233,55.712) U1.U18@55.733,55.212 ; v1(56.233,42.712) U1.E17@56.733,43.212 ; v1(57.233,41.712) U1.D16@57.733,42.212 ; v1(57.233,48.712) U1.L16@57.733,49.212 ; v1(57.233,56.712) U1.V16@57.733,56.212 ; v1(58.233,45.712) U1.H15@58.733,46.212 ; v1(58.233,47.712) U1.K15@58.733,48.212 ; v1(58.233,50.712) U1.M15@58.733,50.212 ; v1(58.233,59.712) U1.AA15@58.733,59.212 ; U1.B15@58.721,40.22 v1@59.221,40.72 ; v1(59.233,44.712) U1.G14@59.733,45.212 ; v1(60.233,42.712) U1.E13@60.733,43.212 ; v1(60.233,54.712) U1.T13@60.733,54.212 ; v1(61.233,44.712) U1.G12@61.733,45.212 ; v1(61.233,53.712) U1.R12@61.733,53.212 ; v1(61.233,56.712) U1.V12@61.733,56.212 ; U1.B11@62.733,40.212 v1(63.233,39.712) ; U1.F11@62.733,44.212 v1(63.233,43.712) ; U1.U11@62.733,55.212 v1(63.233,55.712) ; U1.AA11@62.733,59.212 v1(63.233,59.712) ; U1.G10@63.733,45.212 v1(64.233,44.712) ; U1.R10@63.733,53.212 v1(64.233,53.712) ; U1.E9@64.733,43.212 v1(65.233,42.712) ; U1.H9@64.733,46.212 v1(65.233,45.712) ; U1.T9@64.733,54.212 v1(65.233,54.712) ; U1.L8@65.733,49.212 v1(66.233,48.712) ; U1.N8@65.733,51.212 v1(66.233,51.712) ; U1.V8@65.733,56.212 v1(66.233,56.712) ; U1.B7@66.733,40.212 v1(67.233,39.712) ; U1.AA7@66.733,59.212 v1(67.233,59.712) ; U1.R6@67.733,53.212 v1(68.233,53.712) ; U1.V6@67.733,56.212 v1(68.233,56.712) ; U1.W5@68.733,57.212 v1(69.233,57.712) ; U1.B4@69.733,40.212 v1(70.233,39.712) ; U1.AA3@70.733,59.212 v1(71.233,59.712)
  Top Layer w0.381: C52.1@4.62,43.041 v1@4.62,42.453 ; v1(4.765,42.308) v1@4.62,42.453 ; U4.4@6.278,42.161 4.949,42.161 4.931,42.143 v1@4.62,42.453 ; R46.2@15.593,44.112 21.098,44.112 v1(21.11,44.124) ; U5.8@18.249,40.113 21.417,40.113 21.441,40.136 v1(21.441,40.111) ; L2.2@25.53,69.804 25.67,69.943 R45.1@33.531,69.943 ; R54.2@36.046,73.753 36.046,72.344 v1(36.071,72.318) ; R33.1@37.747,70.02 39.386,70.02 v1(39.424,70.058) ; v1(38.027,76.966) 38.046,76.947 R53.2@38.046,75.472 ; L5.1@124.421,55.409 L5.1@124.608,55.223 ; L7.2@124.421,60.38 L7.2@124.845,60.805
  Top Layer w0.5: R88.2@61.516,64.118 61.516,65.124 v1(61.522,65.13) ; pad.14@90.661,78.572 91.835,77.398 94.77,77.398 95.296,76.872 U16.8@95.296,75.282 95.848,75.834 C46.2@96.855,75.834 ; R64.2@101.47,29.879 C80.1@101.47,31.433 101.63,31.273 U10.1@104.324,31.273 104.199,31.398 C62.1@104.199,33.302 104.199,34.543 pad.0@104.194,34.548 ; v1(121.517,85.298) 121.499,85.316 R107.2@125.138,85.316 ; pad.2@123.371,21.772 123.378,21.765 C139.2@124.464,21.765 ; pad.0@123.625,57.789 123.657,57.757 C140.2@124.845,57.757 ; L11.2@124.464,24.991 C139.2@124.464,21.765 ; L9.1@124.532,19.358 124.464,19.425 C139.2@124.464,21.765 ; C139.2@124.624,21.765 C139.2@124.464,21.765 ; L7.2@124.845,60.805 C140.2@124.845,57.757 ; L5.1@124.862,55.223 124.845,55.239 C140.2@124.845,57.757 ; C140.2@124.904,57.757 C140.2@124.845,57.757 ; pad.3@132.439,21.213 132.584,21.068 L6.1@132.584,19.332 ; pad.1@132.921,57.713 132.939,57.695 L4.1@132.939,55.223
  Top Layer w0.508: 46.714,76.89 46.891,76.712 47.653,76.712 48.978,78.037 R62.2@50.01,78.037 ; U6.2@63.809,71.625 66.467,71.625 v1(66.5,71.658) ; v1(66.348,75.823) R58.2@66.348,77.055 ; R57.2@70.457,78.774 70.457,79.831 70.463,79.837 v1(70.463,79.938)
  Top Layer w0.762: pad.0@25.708,45.75 25.738,45.719 R38.1@25.738,41.532 ; Y3.6@37.391,44.099 pad.1@41.379,44.099 ; C53.2@41.379,45.021 pad.1@41.379,44.099 ; R40.2@41.399,42.96 41.379,42.98 pad.1@41.379,44.099 ; R43.1@41.424,37.651 41.424,36.066 v1(41.43,36.072)
  Top Layer w1: R94.2@42.807,78.514 45.045,78.514 C94.2@45.051,78.508 45.051,77.282 45.444,76.89 46.714,76.89 ; J3.2@47.264,75.017 47.264,76.34 ; R60.2@61.526,67.93 62.913,67.93 62.919,67.924 v1(62.919,67.949) ; R52.2@87.348,78.545 89.36,78.545 R91.2@89.387,78.572 90.661,78.572 pad.14@90.681,78.592 ; R30.1@92.321,13.23 93.45,13.23 ; pad.5@93.45,14.559 93.45,13.23 ; L12.2@94.135,28.681 L12.2@94.186,28.63 ; R29.1@94.344,13.211 94.324,13.23 93.45,13.23
  Bottom Layer w0.254: v1@58.231,59.712 v1(58.233,59.712) ; v1(65.233,45.712) 65.56,45.385 C138.2@65.56,45.008
  Bottom Layer w0.5: C112.2@50.549,40.67 50.558,40.679 C128.2@51.534,40.679 52.2,40.679 v1(52.233,40.712) ; C99.2@51.747,53.225 51.747,53.226 v1@52.224,53.704 ; v1(52.233,44.712) 52.695,45.174 C123.2@52.695,45.205 ; v1(52.233,48.712) 52.287,48.766 C116.2@52.287,49.406 ; v1(52.233,57.712) 52.732,58.212 C96.2@52.732,58.214 ; C127.2@53.49,39.739 54.206,39.739 v1(54.233,39.712) ; C129.2@53.541,42.711 54.232,42.711 v1(54.233,42.712) ; v1(54.233,59.712) 54.725,59.22 C95.2@54.725,59.032 ; C119.2@54.48,46.724 55.221,46.724 v1(55.233,46.712) ; C98.2@55.217,56.427 55.217,55.728 v1(55.233,55.712) ; v1(55.233,51.712) C104.2@55.233,52.403 ; C125.2@56.258,43.447 56.258,42.738 v1(56.233,42.712) v1(57.233,41.712) 57.233,41.646 C126.2@56.776,41.188 ; C117.2@57.213,49.426 57.213,48.732 v1(57.233,48.712) ; v1(57.233,56.712) 57.264,56.681 C97.2@57.935,56.681 ; C105.2@57.427,51.372 57.573,51.372 v1(58.233,50.712) ; C120.2@57.543,45.667 58.187,45.667 v1(58.233,45.712) ; C118.2@57.568,47.724 58.221,47.724 v1(58.233,47.712) ; C101.2@57.716,59.197 v1@58.231,59.712 ; C130.2@58.534,40.663 58.583,40.712 v1(59.233,40.712) ; C121.2@59.17,43.995 59.17,44.649 v1(59.233,44.712) ; C124.2@60.161,41.938 60.161,42.64 v1(60.233,42.712) ; v1(60.233,54.712) 60.238,54.717 C102.2@60.784,54.717 ; C100.2@60.687,57.19 60.755,57.19 v1(61.233,56.712) ; C102.2@60.867,54.634 61.106,54.395 ; C122.2@61.191,44.07 61.191,44.67 v1(61.233,44.712) ; v1(61.233,53.712) 61.248,53.727 61.248,54.116 61.233,54.131 61.233,54.208 61.42,54.395 C103.2@61.796,54.395 ; C131.2@62.461,39.636 63.157,39.636 v1(63.233,39.712) ; v1(63.233,43.712) 63.233,43.988 C136.2@63.659,44.414 63.957,44.712 v1(64.233,44.712) ; v1(63.233,55.712) 63.243,55.723 C137.2@63.243,56.376 ; v1(63.233,59.712) 63.259,59.686 C106.2@63.259,58.981 ; 63.577,43.712 C135.2@63.851,43.438 63.909,43.38 63.909,42.727 64.031,42.606 C134.2@64.278,42.606 65.127,42.606 v1(65.233,42.712) ; v1(64.233,53.712) C114.2@64.234,54.369 C114.2@64.234,54.369 65.036,54.369 65.275,54.609 C109.2@65.275,55.335 ; C108.2@65.747,57.327 65.747,57.198 v1(66.233,56.712) ; v1(66.233,48.712) 66.377,48.856 C115.2@66.377,49.367 ; C113.2@66.825,53.684 67.587,53.684 68.204,53.684 v1(68.233,53.712) ; C132.2@67.003,40.222 67.003,39.943 v1(67.233,39.712) ; v1(67.233,59.712) 67.246,59.699 C110.2@67.246,59.052 ; v1(68.233,56.712) 68.501,56.98 C111.2@68.501,57.748 69.198,57.748 v1(69.233,57.712) ; v1(70.233,39.712) 70.233,38.996 C133.2@70.268,38.961 ; C107.2@71.234,58.976 v1(71.233,59.712)
  other v1: 28.07,51.262
VCC5V: C58.2 C61.1 C156.1 C185.1 C192.1 C197.1 C200.1 C201.1 D8.2 D9.2 L3.2 L8.2 L10.2 N1.5 N2.5 pad.11@15.566,76.992 pad.12@15.566,75.569 pad.13@15.566,74.223 pad.14@112.169,24.769 pad.14@114.125,31.932 pad.15 pad.18 pad.19 pad.20 R35.2 R65.2 R97.2 R99.2 U9.16 U10.8 U18.14 U18.15 U18.16 U18.19 U19.14 U19.15 U19.16 U19.19 U20.14 U20.15 U20.16 U20.19 U21.5 U21.8 X2.1 X3.1 | length 423.7
  Top Layer w0.5: R97.2@3.513,86.261 3.539,86.287 R99.2@3.539,88.37 4.729,88.37 4.753,88.346 v1(4.778,88.371) ; N1.5@8.27,86.668 9.298,86.668 9.299,86.669 v1(9.35,86.669) ; v1(11.972,83.54) C200.1@11.972,84.534 ; C185.1@18.774,82.402 C185.1@19.51,82.402 ; U9.16@111.427,22.5 111.032,22.895 C58.2@111.032,24.743 112.143,24.743 pad.14@112.169,24.769
  Top Layer w0.508: C201.1@3.472,78.026 3.483,78.015 v1(3.483,76.128) 3.483,74.757 4.049,74.19 N2.5@4.888,74.19 ; D9.2@16.454,59.425 17.462,59.425 v1(17.478,59.44) ; v1(17.478,54.31) 18.296,54.31 D8.2@18.353,54.367 ; U21.5@91.697,20.671 90.715,20.671 89.944,21.442 89.944,23.855 90.571,24.481 95.445,24.481 95.738,24.188 C197.1@95.933,23.993 ; U10.8@110.324,31.273 110.709,31.659 C61.1@110.709,33.304 110.836,33.177 112.068,33.177 112.519,32.726 R65.2@112.519,31.885 113.867,31.885 pad.14@113.871,31.881
  Top Layer w1: R35.2@13.546,79.53 14.279,79.53 15.566,78.244 pad.11@15.566,76.992 L3.2@15.566,76.965 ; C197.1@95.738,24.188 95.913,24.363 pad.15@98.86,24.363
  Top Layer w2: pad.13@15.522,74.172 15.566,74.216 pad.13@15.566,74.223 pad.12@15.566,75.569 L3.2@15.566,76.965
  Bottom Layer w0.5: 4.778,86.771 v1(4.778,88.371) ; 116.64,24.769 116.716,24.693
  Bottom Layer w0.508: pad.13@15.566,74.223 14.303,72.961 14.303,65.917 17.478,62.742 v1(17.478,54.31) ; pad.14@114.125,31.932 116.564,31.932 116.716,31.78
  Bottom Layer w1: v1(3.483,76.128) 3.483,86.288 3.965,86.771 4.778,86.771 9.096,86.771 ; 3.635,79.583 14.405,79.583 15.566,78.422 pad.11@15.566,76.992 ; 19.51,76.992 pad.18@19.51,82.377 ; pad.19@54.13,85.399 54.13,93.527 ; 54.486,93.578 54.588,93.476 ; 84.077,93.578 84.229,93.426 84.229,86.949 85.449,85.729 pad.20@86.947,85.729 ; pad.15@98.631,24.363 101.603,24.363 103.305,26.065 110.925,26.065 112.22,24.769 116.64,24.769 ; L8.2@147.825,69.795 150.202,69.795 150.269,69.727
  Bottom Layer w2: pad.13@15.566,74.223 pad.12@15.566,75.569 pad.11@15.566,76.992 19.51,76.992 25.124,76.992 26.292,78.16 26.292,91.159 X3.1@26.217,91.234 28.561,93.578 54.486,93.578 84.077,93.578 122.38,93.578 123.828,92.13 123.828,78.567 125.53,76.865 148.364,76.865 150.269,74.96 150.269,69.727 150.269,40.695 ; X2.1@110.525,9.313 112.943,9.313 114.455,10.825 114.455,17.48 116.716,19.74 116.716,24.693 116.716,31.78 116.716,38.79 118.621,40.695 150.269,40.695 ; L10.2@147.673,33.93 149.372,33.93 150.269,34.828 150.269,40.695
VDD: C82.2 C83.2 C84.2 C85.2 L12.1 pad.14@87.43,48.696 pad.14@93.353,56.321 pad.14@104.397,48.493 pad.17 U17.15 U17.41 U17.65 U17.91 | length 77
  Top Layer w0.203: C82.2@93.119,61.423 v1(93.119,62.006) ; C84.2@94.003,36.38 C84.2@94.101,36.283
  Top Layer w0.4: C85.2@83.925,49.174 U17.65@85.653,49.174 86.876,49.174 87.354,48.696 pad.14@87.404,48.696 ; C82.2@93.16,61.423 93.353,61.23 U17.41@93.353,59.874 pad.14@93.353,56.321 ; U17.91@94.003,37.824 94.003,32.115 L12.1@94.186,31.932 ; U17.15@101.703,48.524 103.564,48.524 pad.14@104.301,48.524
  Bottom Layer w0.4: 86.104,48.874 86.282,48.696 pad.14@87.404,48.696
  Bottom Layer w1: pad.14@93.348,56.291 86.719,56.291 86.104,55.676 86.104,48.874 86.104,41.487 89.741,37.85 93.094,37.85 ; pad.17@94.186,31.932 93.094,33.024 93.094,37.85 ; pad.14@104.27,48.518 102.39,48.518 101.908,48.036 101.908,38.866 100.892,37.85 93.094,37.85
VDDQ: C86.2 C87.2 C88.2 C89.2 C90.2 C91.2 C92.2 C93.2 L13.1 pad.16 U17.4 U17.11 U17.20 U17.27 U17.54 U17.61 U17.70 U17.77 | length 23.6
  Top Layer w0.203: C86.2@83.925,56.461 84.062,56.324 U17.54@85.653,56.324 ; C87.2@84.061,51.75 C87.2@84.084,51.774
  Top Layer w0.254: U17.27@102.576,56.324 U17.27@101.703,56.324 102.982,56.324 103.145,56.486 C92.2@103.508,56.486 104.11,56.486 104.118,56.494 v1(104.168,56.494)
  Top Layer w0.4: v1(83.34,56.469) 83.348,56.461 C86.2@83.925,56.461 ; v1(83.442,45.75) 83.426,45.75 83.401,45.775 83.549,45.924 U17.70@85.653,45.924 ; v1(83.467,41.178) 84.105,41.178 84.301,41.374 U17.77@85.653,41.374 ; C93.2@83.9,45.996 C93.2@83.968,45.928 ; C86.2@84.062,56.324 U17.54@85.653,56.324 ; C87.2@84.084,51.774 U17.61@85.653,51.774 87.527,51.774 v1(87.531,51.77) ; C88.2@84.115,41.188 C88.2@84.283,41.356 ; U17.4@101.703,41.374 102.957,41.374 103.203,41.127 ; U17.11@101.703,45.924 102.945,45.924 103.381,46.359 v1(104.397,46.359) ; U17.20@101.703,51.774 102.717,51.774 102.975,51.516 v1(104.219,51.516) ; C91.2@103.505,51.617 C91.2@103.514,51.608 ; C89.2@103.564,41.143 104.185,41.143 104.194,41.152 v1(104.194,41.178)
  Bottom Layer w0.8: pad.16@90.503,31.983 pad.16@90.554,31.983
W#: U1.B2 U17.88 | length 25.7
  Top Layer w0.203: v1(92.027,34.726) 92.027,37.798 U17.88@92.053,37.824
  Top Layer w0.254: U1.B2@71.733,40.212 v1(72.233,39.712)
  Mid-Layer 1 w0.203: v1(72.233,39.712) 72.703,39.242 77.803,39.242 82.345,34.701 92.053,34.701 v1(92.027,34.726)
ZZ: U1.H1 U17.64 | length 17.7
  Top Layer w0.203: v1(82.832,45.775) 82.807,45.801 83.239,46.232 83.239,47.02 82.655,47.604 82.655,49.56 82.934,49.839 83.782,49.839 85.357,49.839 85.372,49.824 U17.64@85.653,49.824
  Top Layer w0.254: U1.H1@72.733,46.212 v1(73.233,45.712)
  Mid-Layer 1 w0.203: v1(73.233,45.712) 73.296,45.775 v1(82.832,45.775)
pads on no net: J1.0 J4.7 J4.8 S1.0 S2.0 S3.2 S4.2 U1.A17 U1.A20 U1.A21 U1.AA2 U1.AA12 U1.AA14 U1.AA16 U1.AA18 U1.AA21 U1.AB2 U1.AB3 U1.AB5 U1.AB7 U1.AB9 U1.AB11 U1.AB12 U1.AB14 U1.AB15 U1.AB16 U1.AB17 U1.AB18 U1.AB19 U1.AB21 U1.B20 U1.B21 U1.C7 U1.C17 U1.C19 U1.C20 U1.C22 U1.D6 U1.D12 U1.D13 U1.D17 U1.D19 U1.D20 U1.D21 U1.D22 U1.E8 U1.E10 U1.E12 U1.E14 U1.E16 U1.E20 U1.E22 U1.F8 U1.F9 U1.F10 U1.F12 U1.F13 U1.F14 U1.F15 U1.F17 U1.F18 U1.F19 U1.F20 U1.F21 U1.F22 U1.G8 U1.G9 U1.G11 U1.G13 U1.G16 U1.G17 U1.G19 U1.G22 U1.H10 U1.H11 U1.H12 U1.H13 U1.H14 U1.H16 U1.H17 U1.H18 U1.H19 U1.H20 U1.J16 U1.J17 U1.J19 U1.K16 U1.K17 U1.K19 U1.K21 U1.L19 U1.M18 U1.M20 U1.N16 U1.P15 U1.P16 U1.P17 U1.P18 U1.P22 U1.R7 U1.R8 U1.R9 U1.R11 U1.R13 U1.R15 U1.R16 U1.R17 U1.R19 U1.T7 U1.T8 U1.T10 U1.T11 U1.T12 U1.T14 U1.T15 U1.T16 U1.T17 U1.T18 U1.T20 U1.U6 U1.U8 U1.U9 U1.U10 U1.U12 U1.U16 U1.U17 U1.V5 U1.V7 U1.V9 U1.V11 U1.V13 U1.V15 U1.V17 U1.V18 U1.V19 U1.W4 U1.W6 U1.W8 U1.W9 U1.W10 U1.W11 U1.W13 U1.W14 U1.W15 U1.W17 U1.W18 U1.Y3 U1.Y4 U1.Y5 U1.Y6 U1.Y7 U1.Y8 U1.Y9 U1.Y10 U1.Y11 U1.Y14 U1.Y15 U1.Y16 U1.Y17 U1.Y18 U1.Y19 U1.Y20 U2.50 U2.53 U2.54 U2.67 U2.69 U2.70 U2.72 U2.105 U2.107 U2.109 U2.110 U2.112 U2.113 U6.3 U6.4 U6.5 U6.6 U6.11 U6.12 U6.13 U6.14 U9.11 U9.12 U9.13 U9.14 U13.8 U14.8 U17.1 U17.2 U17.3 U17.6 U17.7 U17.16 U17.25 U17.28 U17.29 U17.30 U17.38 U17.39 U17.42 U17.43 U17.51 U17.52 U17.53 U17.56 U17.57 U17.66 U17.75 U17.78 U17.79 U17.84 U17.95 U17.96 U18.3 U18.4 U18.18 U18.20 U19.3 U19.4 U19.18 U19.20 U20.3 U20.4 U20.18 U20.20 U21.4

## Polygon pours and split planes (outlines as drawn)
GND on Top Layer "Top Layer-No Net" (solid, remove dead copper, pour order 1000): 28.502,48.954 31.118,51.367 33.709,51.367 40.287,51.367 40.338,51.414 40.338,45.978 27.206,45.978 27.206,49.024 28.426,49.024 28.502,48.954 28.705,49.141
VCC5V on Top Layer "Top Layer-No Net" (solid, remove dead copper, pour order 1000): 20.45,83.139 20.755,83.139 20.958,83.139 21.161,83.342 21.161,84.307 21.161,85.679 21.339,85.856 21.415,85.933 22.685,85.933 23.828,85.933 23.879,85.882 23.879,85.475 23.879,84.358 23.828,84.307 23.473,84.307 22.228,84.307 22.152,84.231 22.101,84.18 22.101,83.799 22.101,82.783 22.228,82.656 22.533,82.656 22.533,82.377 22.253,82.377 22.203,82.377 21.491,81.665 21.466,81.64 20.501,81.64 20.501,83.088 20.45,83.139
NetC186_1 on Top Layer "Top Layer-No Net" (solid, remove dead copper, pour order 1001): 30.178,82.656 30.458,82.656 30.585,82.783 31.905,84.104 34.496,84.104 34.623,84.104 34.623,81.183 31.753,81.183 30.559,82.377 30.254,82.377 30.254,82.58 30.178,82.656
NetC184_1 on Top Layer "Top Layer-No Net" (solid, remove dead copper, pour order 1002): 28.908,84.993 28.934,85.018 28.934,90.352 28.934,92.333 30.193,93.578 30.27,93.654 35.36,93.654 35.36,90.759 33.329,90.759 33.149,90.759 31.787,89.412 31.401,89.031 31.401,85.018 31.427,84.993 28.908,84.993
NetC186_1 on Top Layer "Top Layer-No Net" (solid, remove dead copper, pour order 1003): 34.725,81.437 34.725,80.091 36.02,78.795 38.713,78.795 39.5,78.795 40.237,78.059 40.287,78.008 41.659,78.008 41.659,79.405 42.015,79.76 45.621,83.367 45.621,85.882 41.151,85.882 39.373,84.104 34.623,84.104 34.623,80.192 34.776,80.04
GND on Top Layer "Top Layer-No Net" (solid, remove dead copper, pour order 1004): 23.896,86.263 23.871,86.288 23.871,90.124 23.871,90.301 24.386,90.809 24.438,90.86 24.438,92.079 24.438,92.181 24.335,92.283 24.309,92.308 22.091,92.308 21.937,92.308 21.498,91.876 21.034,91.419 21.034,88.854 21.034,86.669 21.447,86.263 23.896,86.263
GND on Top Layer "Top Layer-No Net" (solid, remove dead copper, pour order 1005): 23.574,89.412 28.222,89.412 28.248,89.438 28.349,89.336 28.349,84.663 28.349,82.275 28.578,82.046 28.603,82.021 30.102,82.021 30.458,82.021 30.458,80.954 30.254,80.751 30.127,80.624 24.717,80.624 24.692,80.624 24.539,80.776 24.489,80.827 24.489,83.647 24.489,85.634 23.86,86.263 23.574,86.549 23.574,89.412
GND on Top Layer "Top Layer-No Net" (solid, remove dead copper, pour order 1006): 52.987,89.666 52.987,90.098 53.775,90.886 53.8,90.911 59.261,90.911 62.309,90.911 62.766,90.454 62.766,86.314 62.766,84.434 63.046,84.155 63.071,84.129 63.427,84.129 64.875,84.129 64.9,84.104 64.9,82.885 64.671,82.656 64.621,82.605 59.337,82.605 59.312,82.605 59.109,82.808 59.007,82.91 59.007,84.739 59.007,88.117 58.804,88.32 58.753,88.371 57.915,88.371 56.213,88.371 56.035,88.193 55.985,88.142 52.962,88.142 52.962,90.073 53.013,90.124
GND on Top Layer "Top Layer-No Net" (solid, remove dead copper, pour order 1007): 85.576,88.549 85.474,88.65 85.474,90.53 85.474,90.835 85.703,91.063 85.83,91.19 95.05,91.19 95.075,91.19 95.405,90.86 95.405,87.457 95.405,84.815 95.685,84.536 95.71,84.51 96.167,84.51 97.666,84.51 97.666,84.18 97.666,83.393 97.336,83.062 97.31,83.037 94.389,83.037 92.053,83.037 91.824,83.266 91.799,83.291 91.799,84.205 91.799,88.523 91.545,88.777 90.783,88.777 88.954,88.777 88.827,88.65 88.674,88.498 87.836,88.498 85.626,88.498 85.576,88.549
VCC5V on Top Layer "Top Layer-No Net" (solid, remove dead copper, pour order 1008): 55.121,86.11 55.451,86.11 55.604,86.11 55.985,86.491 55.985,87.736 55.985,87.787 56.239,88.041 56.696,88.041 58.296,88.041 58.321,88.015 58.321,87.05 58.321,86.542 58.22,86.441 58.194,86.415 57.991,86.415 56.772,86.415 56.67,86.314 56.518,86.161 56.518,85.882 56.518,84.967 56.67,84.815 56.696,84.79 56.95,84.79 56.95,84.459 56.924,84.434 56.747,84.434 53.064,84.434 52.962,84.536 52.962,85.323 52.962,86.136 52.987,86.11 55.121,86.11
VCC5V on Top Layer "Top Layer-No Net" (solid, remove dead copper, pour order 1009): 87.481,86.441 88.065,86.441 88.217,86.593 88.573,86.949 88.573,87.05 88.573,87.965 88.928,88.32 89.03,88.422 89.64,88.422 91.062,88.422 91.087,88.396 91.113,88.371 91.113,88.066 91.113,86.898 91.037,86.822 91.011,86.796 90.706,86.796 89.487,86.796 89.411,86.72 89.259,86.568 89.259,86.161 89.259,85.272 89.386,85.145 89.69,85.145 89.69,84.866 89.665,84.84 89.411,84.84 89.335,84.84 89.233,84.739 89.208,84.713 85.728,84.713 85.652,84.713 85.601,84.764 85.576,84.79 85.576,85.145 85.576,86.441 87.481,86.441
NetC155_1 on Top Layer "Top Layer-No Net" (solid, remove dead copper, pour order 1010): 63.325,87.076 63.325,93.299 63.681,93.654 68.837,93.654 74.12,93.654 74.146,93.68 74.171,93.654 74.171,91.089 74.171,90.759 74.12,90.708 69.218,90.708 66.551,90.708 66.018,90.174 65.84,89.997 65.84,87.076 63.325,87.076
NetC157_1 on Top Layer "Top Layer-No Net" (solid, remove dead copper, pour order 1011): 63.401,84.79 67.694,84.79 82.096,84.79 82.121,84.764 82.121,82.123 82.121,81.919 80.216,80.014 79.53,79.329 79.53,78.668 79.53,78.008 79.556,77.982 78.438,77.982 77.727,78.694 77.6,78.821 77.244,78.821 72.063,78.821 71.656,79.227 71.656,79.583 71.656,79.633 71.377,79.913 70.717,80.573 67.516,80.573 66.627,80.573 65.814,81.386 65.586,81.615 65.586,83.977 65.586,84.002 65.129,84.459 64.417,84.459 63.376,84.459 63.351,84.485 63.351,84.561 63.351,84.739 63.401,84.79
NetC191_1 on Top Layer "Top Layer-No Net" (solid, remove dead copper, pour order 1012): 96.142,87.457 96.142,88.676 96.142,93.451 96.472,93.781 96.523,93.832 97.768,93.832 107.775,93.832 107.826,93.781 107.851,93.756 107.851,92.714 107.851,90.784 107.699,90.632 107.674,90.606 107.089,90.606 99.469,90.606 99.215,90.352 99.114,90.251 99.114,87.584 99.114,87.558 99.012,87.457 96.142,87.457
NetC193_1 on Top Layer "Top Layer-No Net" (solid, remove dead copper, pour order 1013): 96.117,85.171 115.903,85.171 116.005,85.069 116.005,84.612 116.005,82.453 115.395,81.843 115.37,81.818 114.506,81.818 114.151,81.818 113.287,80.954 113.236,80.903 113.236,79.024 112.093,79.024 111.89,79.227 111.382,79.735 110.976,79.735 106.581,79.735 105.718,80.599 105.591,80.726 103.533,80.726 99.368,80.726 98.784,81.31 98.326,81.767 98.326,84.282 98.326,84.459 97.945,84.84 97.437,84.84 96.218,84.84 96.117,84.942 96.117,85.171
VDD on Bottom Layer "Top Layer-No Net" (solid, remove dead copper, pour order 1000): 91.265,37.85 92.764,36.352 92.764,36.326 93.399,36.326 94.77,37.698 94.77,37.85 91.189,37.85
E_AVDD on Bottom Layer "Top Layer-No Net" (solid, remove dead copper, pour order 1014): 42.218,12.73 40.211,10.723 39.983,10.723 44.555,10.723 42.548,12.73 42.218,12.73